# EAGLE board MaxOr-front-panel (EAGLE 7.3.0)
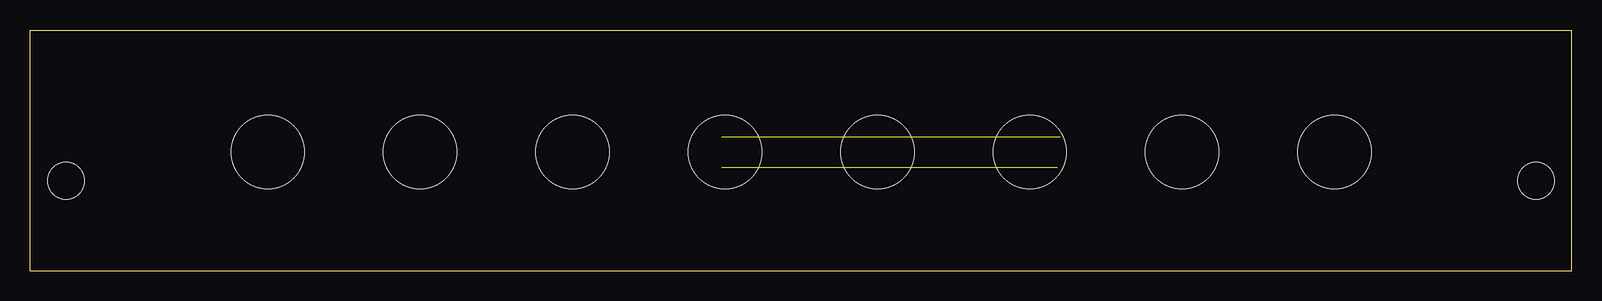
[diagram p0: board, top side]
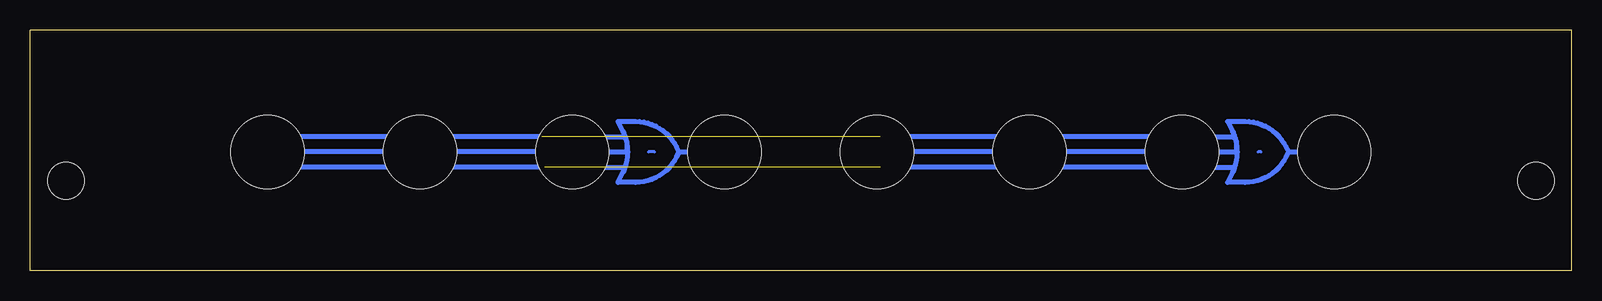
[diagram p1: board, bottom side, seen from below]

Size 128.5 x 20.07 mm. Coordinates in mm from the lower left corner, seen from the top.
Outline: 0,0 128.5,0 128.5,20.07 0,20.07 0,0
Copper layers (1*16): Top 0.035mm / dielectric 1.5mm / Bottom 0.035mm
Design rules "Othermill-DRC-1-64": minimum track width 8mil, minimum drill 0.8mm, track to track 0.39878125mm, track to pad 0.39878125mm, pad to pad 0.39878125mm, via to via 0.39878125mm, smd to smd 0mil, copper to edge 0mil, drill to drill 1mil, minimum pad ring 10mil, minimum via ring 10mil, stop-mask expansion 1mil, vias tented up to drill 30mil, thermal gap 10mil
Holes 6.1 mm at 70.61,9.91 83.31,9.91 96.01,9.91 108.71,9.91 57.91,9.91 45.21,9.91 32.51,9.91 19.81,9.91

## Footprints (pad centres in the part's own frame; a part is rotated, then mirrored left to right if it is on the bottom)
MOUNTING-FIRST = hole 3.048: 3,7.5

## Placement (x,y rotation side)
U$1  MOUNT  [MOUNTING-FIRST]  0,0 0 top
U$3  MOUNT  [MOUNTING-FIRST]  128.5,0 0 bottom

## Library data of the parts
U$1 U$3 = barsstronics-mounting

## Tracks (layer width: path | path; a pad name or v marks a point on that pad's centre or on a via)
LABEL2
  Bottom 0.406: 74.42,9.91 74.64,10.34 arc-63 78.05,12.45 79.5,12.45 79.08,11.61 | 74.42,9.91 74.64,9.47 arc63 78.05,7.37 79.5,7.37 79.08,8.2 | 79.08,8.2 arc-53 79.08,11.61 | 80.77,11.18 78.99,11.18 | 80.77,8.64 78.99,8.64 78.99,8.42 arc45 79.08,8.2 | 78.99,11.18 78.99,11.39 arc-45 79.08,11.61 | 80.77,9.91 78.74,9.91 78.74,10.56 arc-45 78.99,11.18 | 74.42,9.91 73.15,9.91
LABEL3
  Bottom 0.406: 23.62,9.91 23.84,10.34 arc-63 27.25,12.45 28.7,12.45 28.28,11.61 | 23.62,9.91 23.84,9.47 arc63 27.25,7.37 28.7,7.37 28.28,8.2 | 28.28,8.2 arc-53 28.28,11.61 | 29.97,11.18 28.19,11.18 | 29.97,8.64 28.19,8.64 28.19,8.42 arc45 28.28,8.2 | 28.19,11.18 28.19,11.39 arc-45 28.28,11.61 | 29.97,9.91 27.94,9.91 27.94,10.56 arc-45 28.19,11.18 | 23.62,9.91 22.35,9.91
N$15
  Bottom 0.406: 35.05,9.91 57.91,9.91
N$24
  Bottom 0.406: 83.31,9.91 108.71,9.91
N$25  (1 unrouted)
  Bottom 0.406: 35.05,11.18 57.66,11.18 | 85.85,11.18 108.46,11.18
N$26  (1 unrouted)
  Bottom 0.406: 34.8,8.64 57.66,8.64 | 85.6,8.64 108.46,8.64
N$28
  Bottom 0.254: 25.91,9.91 26.16,9.91
N$29
  Bottom 0.254: 76.45,9.91 76.96,9.91